# Altium PCB Board.PcbDoc
Units mil, origin at the board's own origin, x right, y up, seen from the top; angles counter-clockwise.
Board outline 645 x 495 mil, 2 copper layers (Top Layer, Bottom Layer); 7 components, 9 nets, 28 pads, 11 vias.
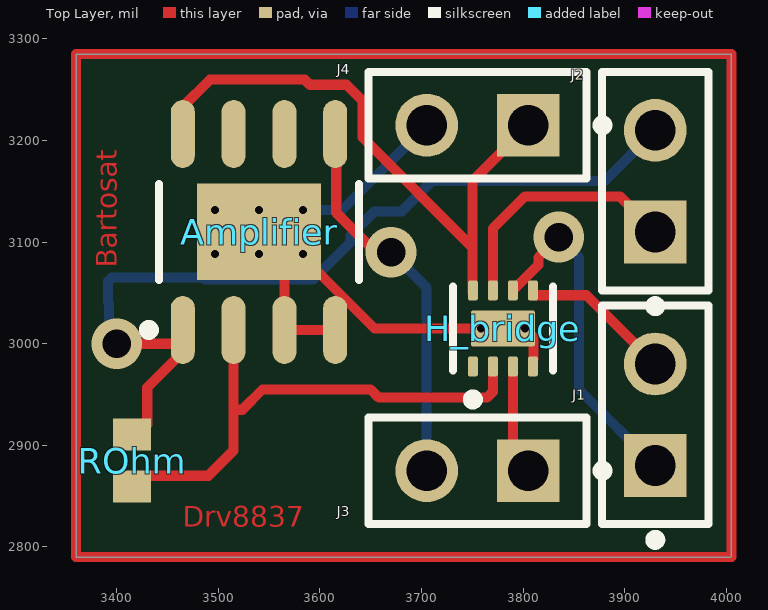
[diagram p0: Top Layer view]
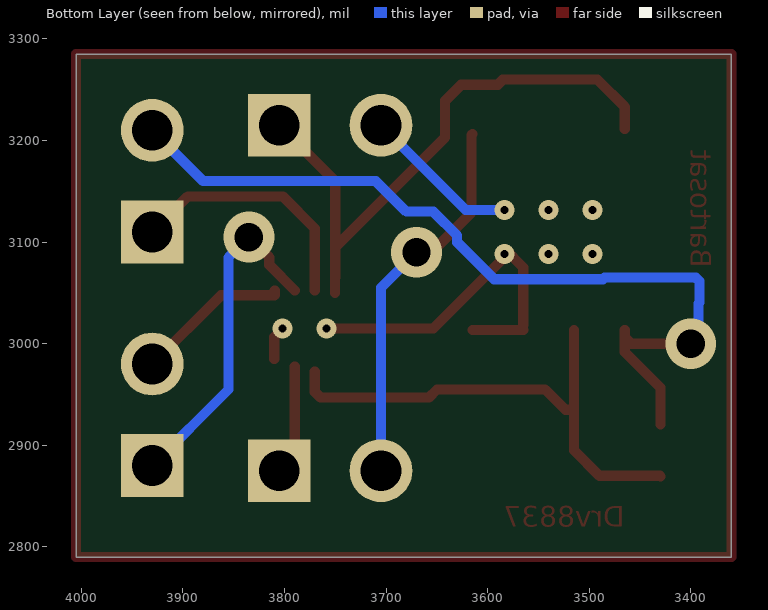
[diagram p1: Bottom Layer view, seen from below]
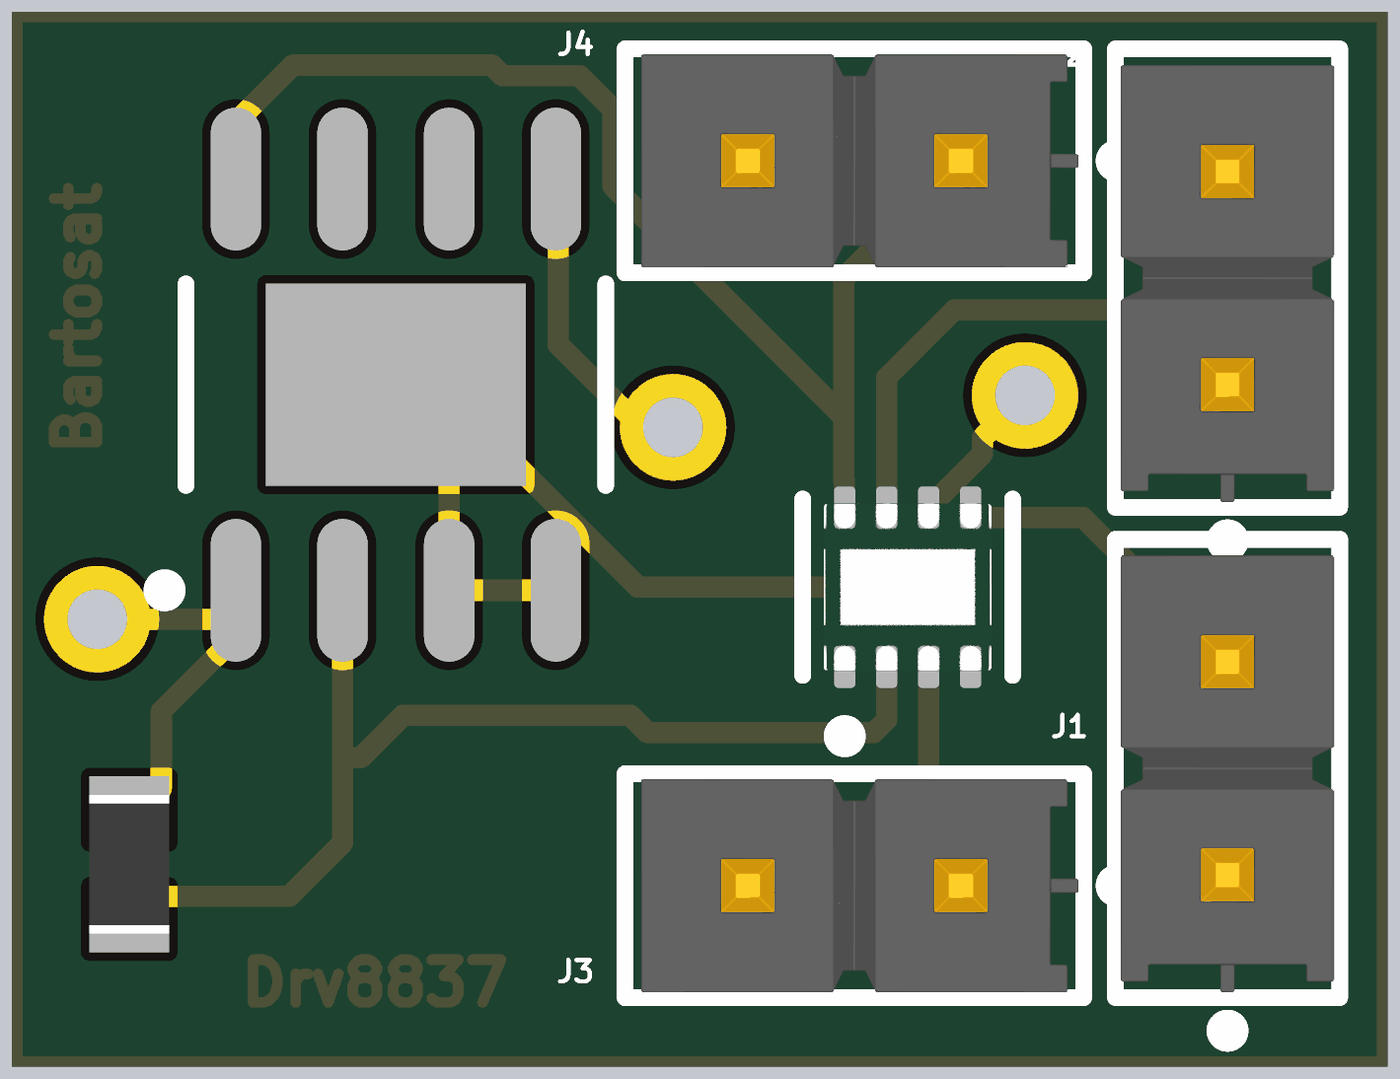
[diagram p2: 3D render of the assembled board from above, using the file's embedded part models]

## Layer stack, top to bottom
Top Solder: solder mask 0.4, Solder Resist, Dk 3.5
Top Layer: signal copper 1.4
Dielectric 1: dielectric 12.6, FR-4, Dk 4.8
Bottom Layer: signal copper 1.4
Bottom Solder: solder mask 0.4, Solder Resist, Dk 3.5

## Board outline
3360,2790 3360,3285 4005,3285 4005,2790

## Design rules (kind name [scope] priority, off if disabled: settings)
Clearance [All] p1: gap=10 ignorepadtopadclearanceinfootprint=FALSE except(0: Arc-Hole Track-Hole SMDPad-Hole THPad-Hole Via-Hole Fill-Hole Poly-Hole Region-Hole Text-Hole)
PolygonConnect [All] p1: connectstyle=Relief reliefconductorwidth=10 reliefentries=4 polygonreliefangle="90 Angle" airgapwidth=10
RoomDefinition CoilDriver [InComponentClass('CoilDriver')] p1: confinementstyle=ConfineIn formatcopy=TRUE lockcomponents=FALSE outline 5920,1220 7235,1220 7235,1620 5920,1620
RoutingVias [All] p1: holewidth=28 width=50 viastyle="Through Hole" minholewidth=28 minwidth=50 maxholewidth=28 maxwidth=50
SolderMaskExpansion [All] p1: expansion=4 istentingtop=FALSE
Width [All] p1: maxlimit=10 minlimit=10 preferedwidth=10
30 further rules are at their usual default settings.

## Components (designator, comment, footprint, x,y, rotation, side; value= is the part's Value field where it differs from the comment)
Amplifier "MAX9918ASA+" MAXM-S8E+14_L 3540,3110 r90 top
H_bridge "DRV8837DSGR" FP-DSG0008A-MFG 3780,3015 r90 top
J1 "TSW-102-07-L-S" FP-TSW-102-07-L-S-MFG 3930,2930 r90 top
J2 "TSW-102-07-L-S" FP-TSW-102-07-L-S-MFG 3930,3160 r90 top
J3 "TSW-102-07-L-S" FP-TSW-102-07-L-S-MFG 3755,2875 r180 top
J4 "TSW-102-07-L-S" FP-TSW-102-07-L-S-MFG 3755,3215 r180 top
ROhm "CRCW06030000Z0EA" RESC1609X50X30NL8T20 3415,2885 r90 top

## Footprints (in the part's own frame and the unit in brackets; to place one, negate y for a bottom-side part, rotate by r counter-clockwise, add the part's x,y. Pads: shape width x height; smd on the part's side, far side on the other; paste and mask are expansions set on the pad)
FP-DSG0008A-MFG [mm]
  rrect40% 0.5x0.25 smd paste+0 mask+0: 1(-0.95,0.75) 2(-0.95,0.25) 3(-0.95,-0.25) 4(-0.95,-0.75) 5(0.95,-0.75) 6(0.95,-0.25) 7(0.95,0.25) 8(0.95,0.75)
  rrect11% 0.9x1.6 smd paste-1000 mask+0: 9(0,0)
  silkscreen extent -1.9,-1.25 1.05,1.25, body extent -1.3,-1.15 1.3,1.15, height 0.25
FP-TSW-102-07-L-S-MFG [mm]
  rect 1.57x1.57 hole 1.02 paste-1000 mask+0: 1(-1.27,0)
  round 1.57 hole 1.02 paste-1000 mask+0: 2(1.27,0)
  silkscreen extent -3.25,-1.34 2.73,1.34, body extent -2.83,-1.44 2.83,1.44, height 0.25
MAXM-S8E+14_L [mm] "SOIC, 8-Leads, Body 4.89x3.9mm, Pitch 1.27mm, Thermal Pad 2.945x2.26mm, IPC High Density"
  oval 1.7x0.6 smd: 1(-2.45,1.905) 2(-2.45,0.635) 3(-2.45,-0.635) 4(-2.45,-1.905) 5(2.45,-1.905) 6(2.45,-0.635) 7(2.45,0.635) 8(2.45,1.905)
  rect 2.41x3.1 smd: 9(0,0)
  silkscreen extent -2.57,-2.5 1.2,2.88, body extent -2,-2.5 2,2.5, height 1.68
RESC1609X50X30NL8T20 [mm] "Chip Resistor, 2-Leads, Body 1.65x0.95mm, IPC Medium Density"
  rect 0.8x0.95 smd: 1(-0.65,0) 2(0.65,0)
  body extent -0.82,-0.48 0.82,0.48, height 0.5

## Part data
Amplifier: library part CMP-0252-00087-1, "-20 to 75 V Input Range, Precision Uni- / Bidirectional, Current-Sense Amplifier, Adjustable Gain, -40 to 125 degC, 8-Pin SOIC (S8E+14), Pb-Free", Bi-Dir. Curr. Sense=Yes, Code_JEDEC=MS-012, ComponentLink1Description="Manufacturer URL", ComponentLink1URL=http://www.maximintegrated.com/, ComponentLink2Description=Datasheet, ComponentLink2URL=http://datasheets.maximintegrated.com/en/ds/MAX9918-MAX9920.pdf, ComponentLink3Description="Package Specification", ComponentLink3URL=http://pdfserv.maximintegrated.com/package_dwgs/21-0111.PDF, DatasheetVersion="Rev. 4", Gain=Adj., Industry Qualified="Automotive - AECQ100, Automotive - General", Mounting Technology="Surface Mount", PackageDescription="8-Pin Small-Outline IC, Narrow, Body 3.9 x 4.89 mm, Exposed Pad 2.945 x 2.26 mm, Pitch 1.27 mm", PackageReference=S8E+14, PackageVersion="Rev. E, 01/2009", PartNumber=MAX9918ASA+
H_bridge: library part CMP-04915-000004-1, "IC MOTOR DRIVER PAR 8WSON", Ambient Temperature Range High=+85°C, Ambient Temperature Range Low=-40°C, Manufacturer="Texas Instruments", Max Junction Temp=+150°C, Max Supply Voltage=7V, Min Supply Voltage=1.8V, Nominal Supply Current=300-700uA, Output Current=1.8A, Output Voltage=0-11V, Package=DSG0008A, Switching Frequency=0-250kHz, Temperature="-40°C to +85°C", Automotive=No, Category=IC, ComponentLink2Description=Datasheet, ComponentLink2URL=http://www.ti.com/lit/ds/symlink/drv8837.pdf, Device Class L1="Integrated Circuits (ICs)", Device Class L2="Power Management ICs", Device Class L3="Motor Drivers", Digikey Description="IC MOTOR DRIVER PAR 8WSON", Height=0.8mm, Lead Free=Yes, Manufacturer Part Number=DRV8837DSGR, Motor Type=Brushed, Mouser Description="Motor / Motion / Ignition Controllers & Drivers 1.8A Low Vltg Brush DC Motor Driver", Number Of Outputs=2, Octopart=https://octopart.com/drv8837dsgr-texas+instruments-23786726, RoHS=TRUE, Standoff Height=0mm, Temperature Range High=+85°C, Temperature Range Low=-40°C
J1 J2 J3 J4: library part CMP-02766-001428-1, "CONN HEADER VERT 2POS 2.54MM", Color=Black, Current Rating=7.6A, Max Operating Temperature=125°C, Max Voltage Rating (AC)=550V, Min Operating Temperature=-55°C, Package Quantity=1, Connector Type="Male Pin", Contact Material=Bronze, Contact Mating Length=0.23inch, Contact Plating=Gold, Contact Type="Male Pin", Depth=2.54mm, Gender=Male, Housing Color=Black, Housing Material=Polyester, Lead Free="Lead Free", Length=5.08mm, Max Current Rating=7.6A, Mount="Through Hole", Number of Contacts=2, Number of Positions=2, Number of Rows=1, Orientation=Straight, Packaging=Bulk, Pitch=2.54mm, Radiation Hardening=No, REACH SVHC="No SVHC", RoHS Compliant=Yes, Series=TSW, Termination=Solder, Voltage Rating=550V, Width=2.54mm
ROhm: library part CMP-2000-03816-5, "Chip Resistor, 0 Ohm, Jumper, 100 mW, -55 to 155 degC, 0603 (1608 Metric), RoHS, Tape and Reel", Manufacturer="Vishay Semiconductor", Max Operating Temperature="155 degC", Min Operating Temperature="-55 degC", Package Quantity=5000, Voltage Rating="75 V", ComponentLink1Description="Manufacturer URL", ComponentLink1URL=http://www.vishay.com/, ComponentLink2Description=Datasheet, ComponentLink2URL=http://www.vishay.com/docs/20035/dcrcwe3.pdf, DatasheetVersion=06/2012, Height="0.45 mm", Length="1.55 mm", Mount="Surface Mount", Mounting Technology="Surface Mount", PackageDescription="2-Pin Surface Mount Device, Body 1.575 x 0.85 mm", PackageReference=0603, Packaging="Tape and Reel", Pins=2, REACH SVHC=Unknown, RoHSCompliant=true

## Via types
v1: diameter 19.68, hole 7.87, Top Layer to Bottom Layer, 8 vias
v2: diameter 50, hole 28, Top Layer to Bottom Layer, 3 vias

## Nets (pads, with @x,y where several pads share a name; then routed paths per layer and width w, separated by ;. In a path a pad name is that pad's centre, name@x,y a point inside that pad or via, vN(x,y) a via of type N, cw(c..) or ccw(c..) an arc to the next point about the centre after c; other vN are vias at no path point)
5V: Amplifier.8 H_bridge.8 J4.1 | length 595.1
  Top Layer w10: Amplifier.8@3465,3211.46 3465,3233.11 3491.81,3259.92 3585.08,3259.92 3590.08,3254.92 3626.11,3254.92 3641.81,3239.22 3641.81,3203.19 3750,3095 ; H_bridge.8@3750.24,3050 3750.24,3064.76 3750,3065 3750,3095 ; J4.1 3750,3160 3750,3095
GND: Amplifier.3 Amplifier.4 Amplifier.9 H_bridge.4 H_bridge.9 J4.2 | length 534.3
  Top Layer w10: Amplifier.3 Amplifier.4 ; Amplifier.3@3565,3018.54 3565,3075.04 3583.31,3093.35 v1(3583.31,3088.35) 3583.31,3085.28 3653.58,3015 v1(3758.35,3015) ; v1(3801.65,3015) 3810,3006.65 H_bridge.4@3810,2985
  Bottom Layer w10: v1(3583.31,3131.65) 3621.65,3131.65 J4.2
  other v1: 3496.69,3088.35 3540,3088.35 3496.69,3131.65 3540,3131.65
NetAmplifier_1: Amplifier.1 J2.2 ROhm.2 | length 852.5
  Top Layer w10: v2(3400,3000) 3458.71,3000 3465,3006.3 Amplifier.1 3465,2991.89 3430,2956.89 ROhm.2@3430,2920.59
  Bottom Layer w10: v2(3400,3000) 3392.35,3007.65 3392.35,3039.53 3391.46,3040.41 3391.46,3061.46 3395,3065 3400,3065 3484.91,3065 3486.4,3063.5 3593.6,3063.5 3630,3099.91 3630,3106.57 3653.43,3130 3680,3130 3710,3160 3880,3160 J2.2
NetAmplifier_2: Amplifier.2 H_bridge.2 ROhm.1 | length 503.4
  Top Layer w10: ROhm.1@3430,2869.41 3430.59,2870 3490,2870 3515,2895 3515,2935 ; Amplifier.2 3515,2935 ; H_bridge.2@3770.16,2972.76 3770.16,2952.76 3764.3,2946.9 3657.92,2946.9 3649.81,2955 3543.43,2955 3523.43,2935 3515,2935
NetAmplifier_5: Amplifier.5 J3.2 | length 379.1
  Top Layer w10: Amplifier.5 3616.02,3205.43 3616.02,3128.98 3652.44,3092.56 3667.44,3092.56 v2(3670,3090)
  Bottom Layer w10: v2(3670,3090) 3705,3055 J3.2@3705,2873.42
NetH_bridge_3: H_bridge.3 J3.1 | length 108.9
  Top Layer w10: H_bridge.3 3789.84,2890.16 J3.1
NetH_bridge_5: H_bridge.5 J1.2 | length 153.2
  Top Layer w10: H_bridge.5 3809.53,3047.8 3809.61,3047.72 3862.28,3047.72 J1.2
NetH_bridge_6: H_bridge.6 J1.1 | length 370.7
  Top Layer w10: H_bridge.6 3815,3077.56 3815,3085 v2(3835,3105)
  Bottom Layer w10: v2(3835,3105) 3855,3085 3855,2955 J1.1 ; J1.1@3915,2870 J1.1@3950,2870
NetH_bridge_7: H_bridge.7 J2.1 | length 248.5
  Top Layer w10: H_bridge.7 3770.16,3113.44 3801.72,3145 3895,3145 J2.1
pads on no net: Amplifier.6 Amplifier.7 H_bridge.1
copper on no net: | length 2280
  Top Layer w10: 3360,2790 4005,2790 4005,3285 3360,3285 3360,2790

## Other copper
Top Layer:
  text "Bartosat" at 3400,3075 h20 r90
  text "Drv8837" at 3465,2820 h20